# Altium PCB Schematics.PcbDoc
Units mm, origin at the board's own origin, x right, y up, seen from the top; angles counter-clockwise.
Board outline 70 x 70 mm, 2 copper layers (Top Layer, Bottom Layer), stack 1.1 mm thick; 21 components, 14 nets, 82 pads, 2 vias.
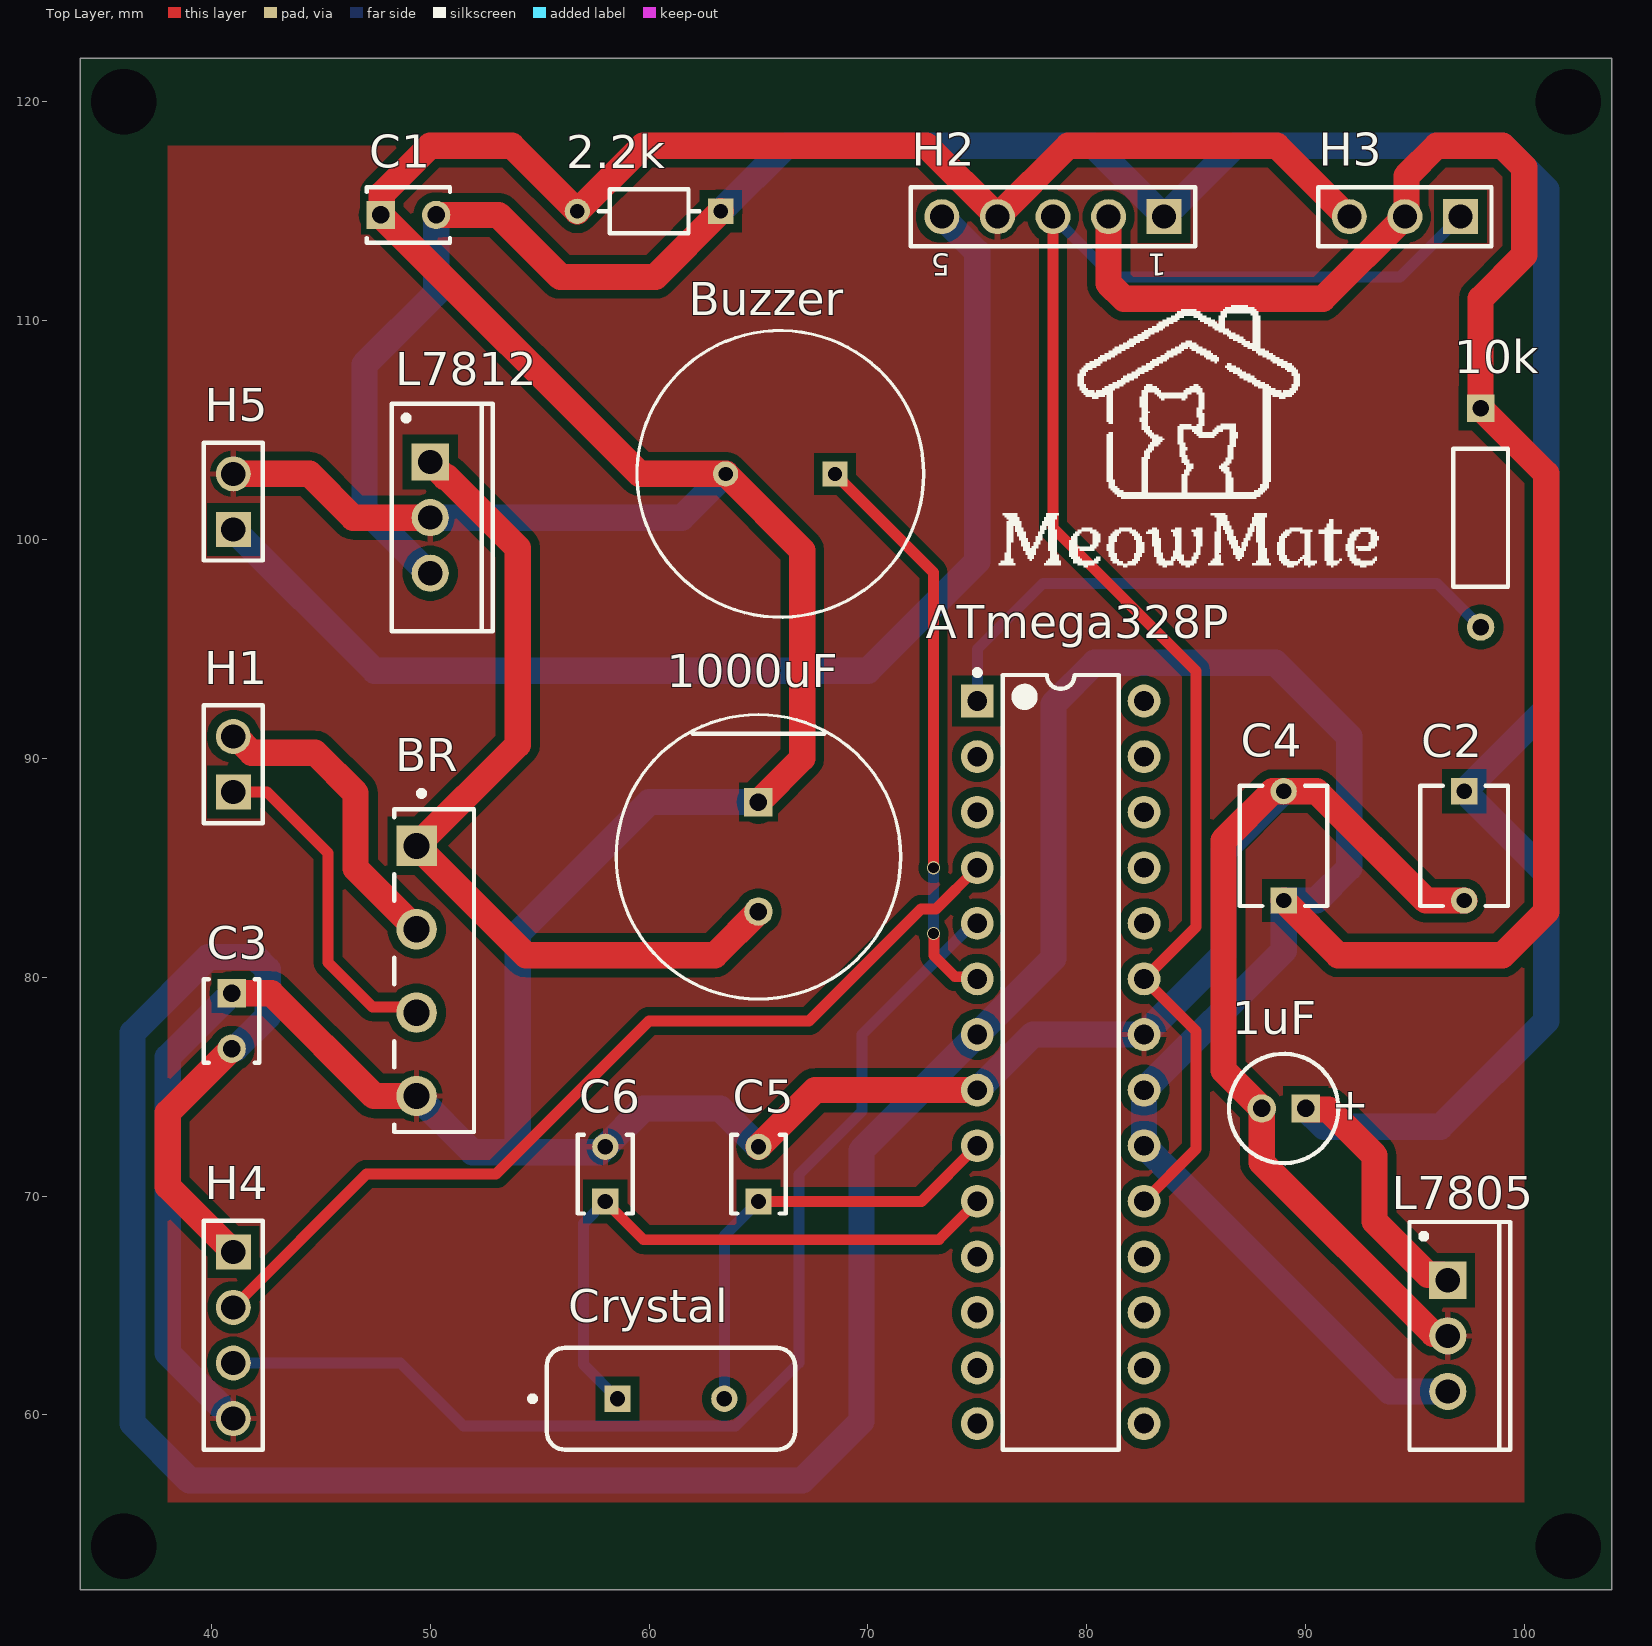
[diagram p0: Top Layer view]
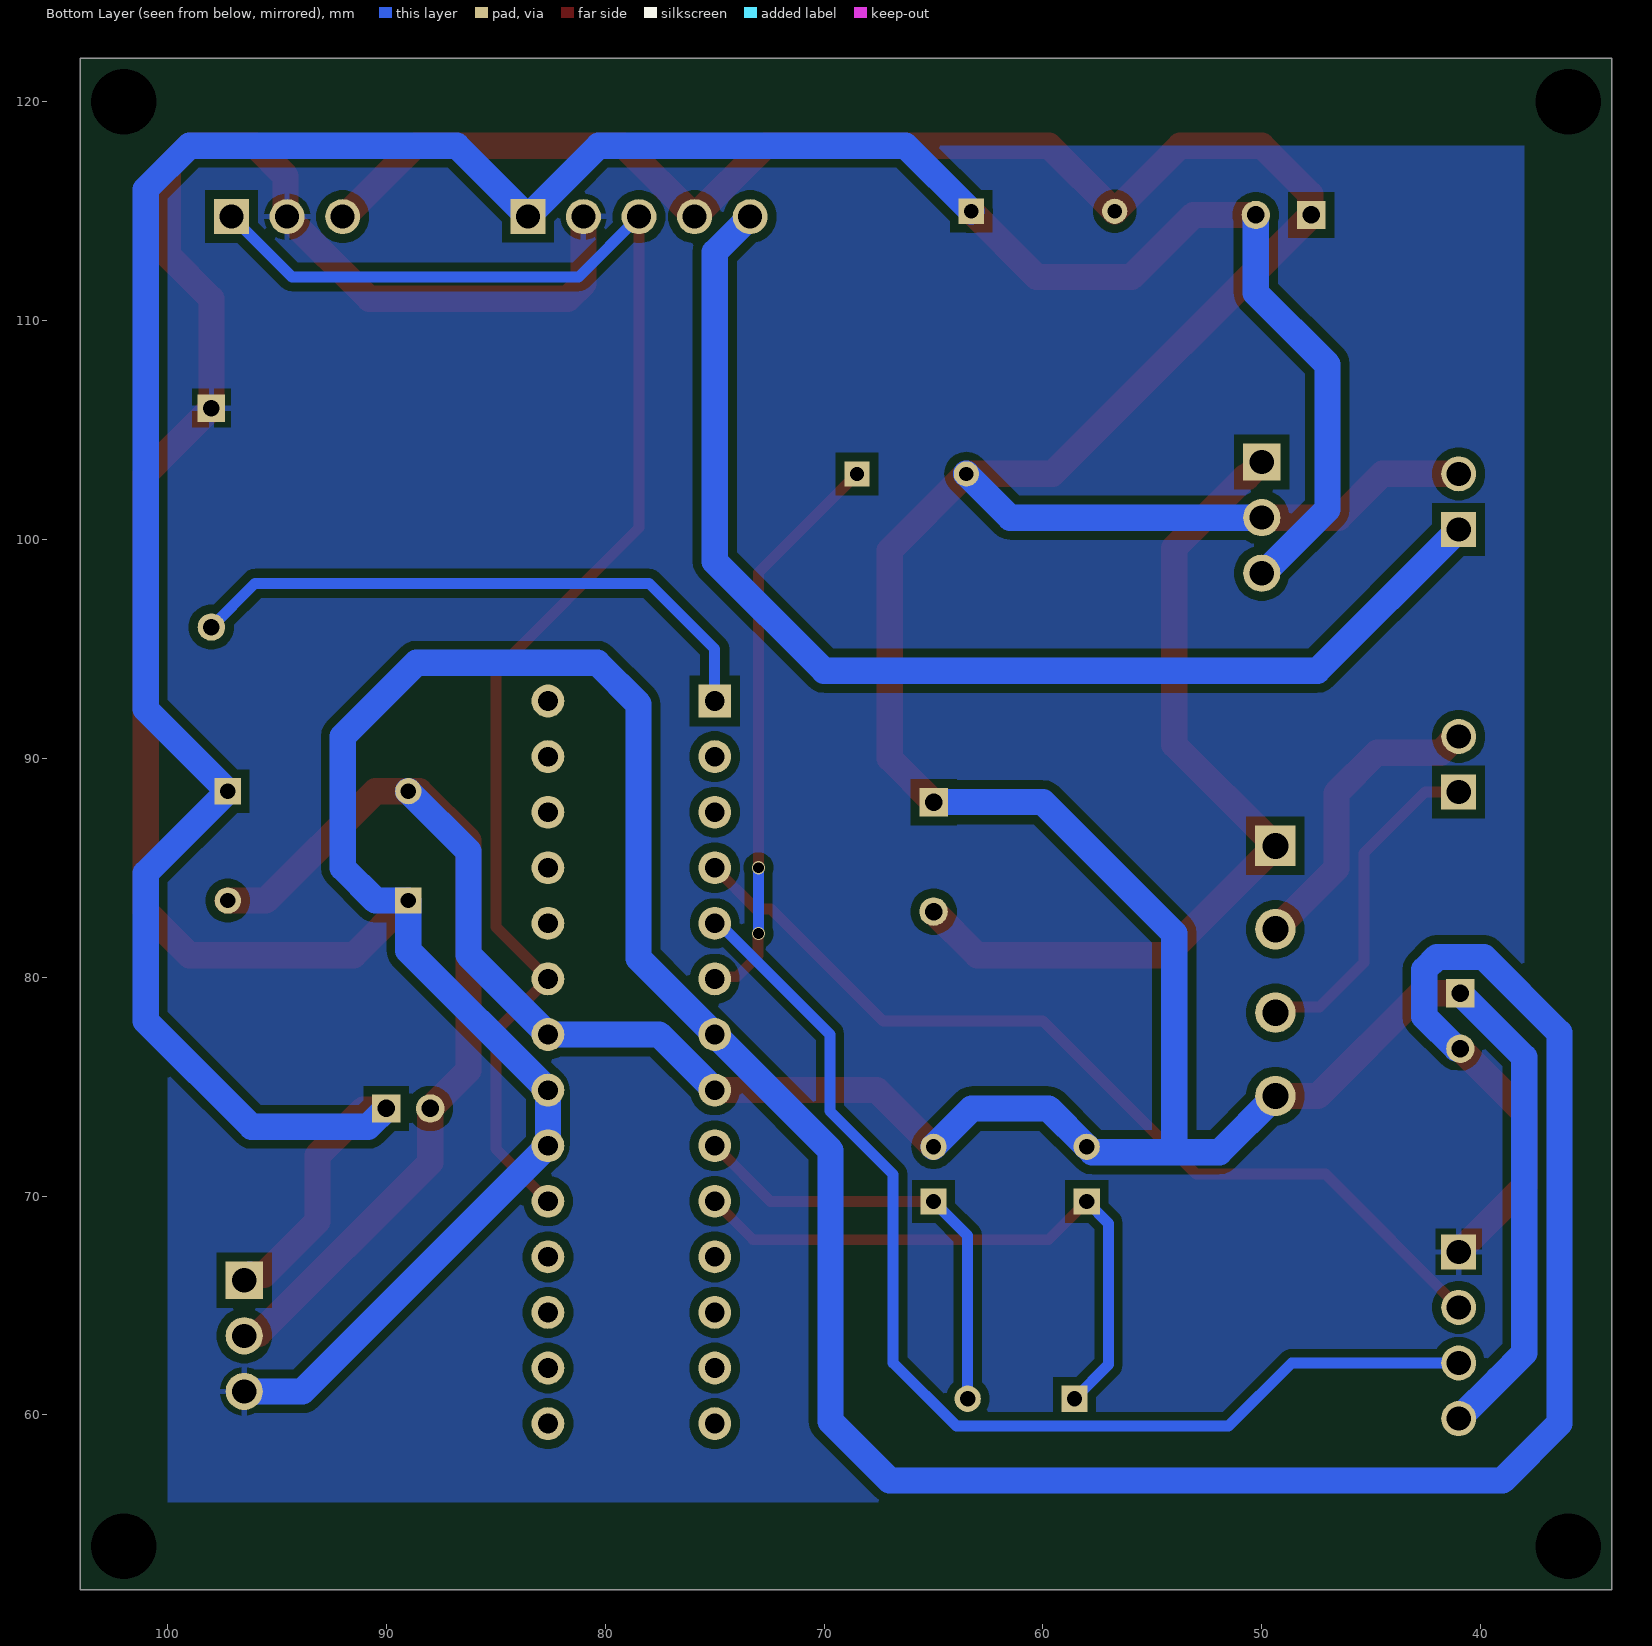
[diagram p1: Bottom Layer view, seen from below]
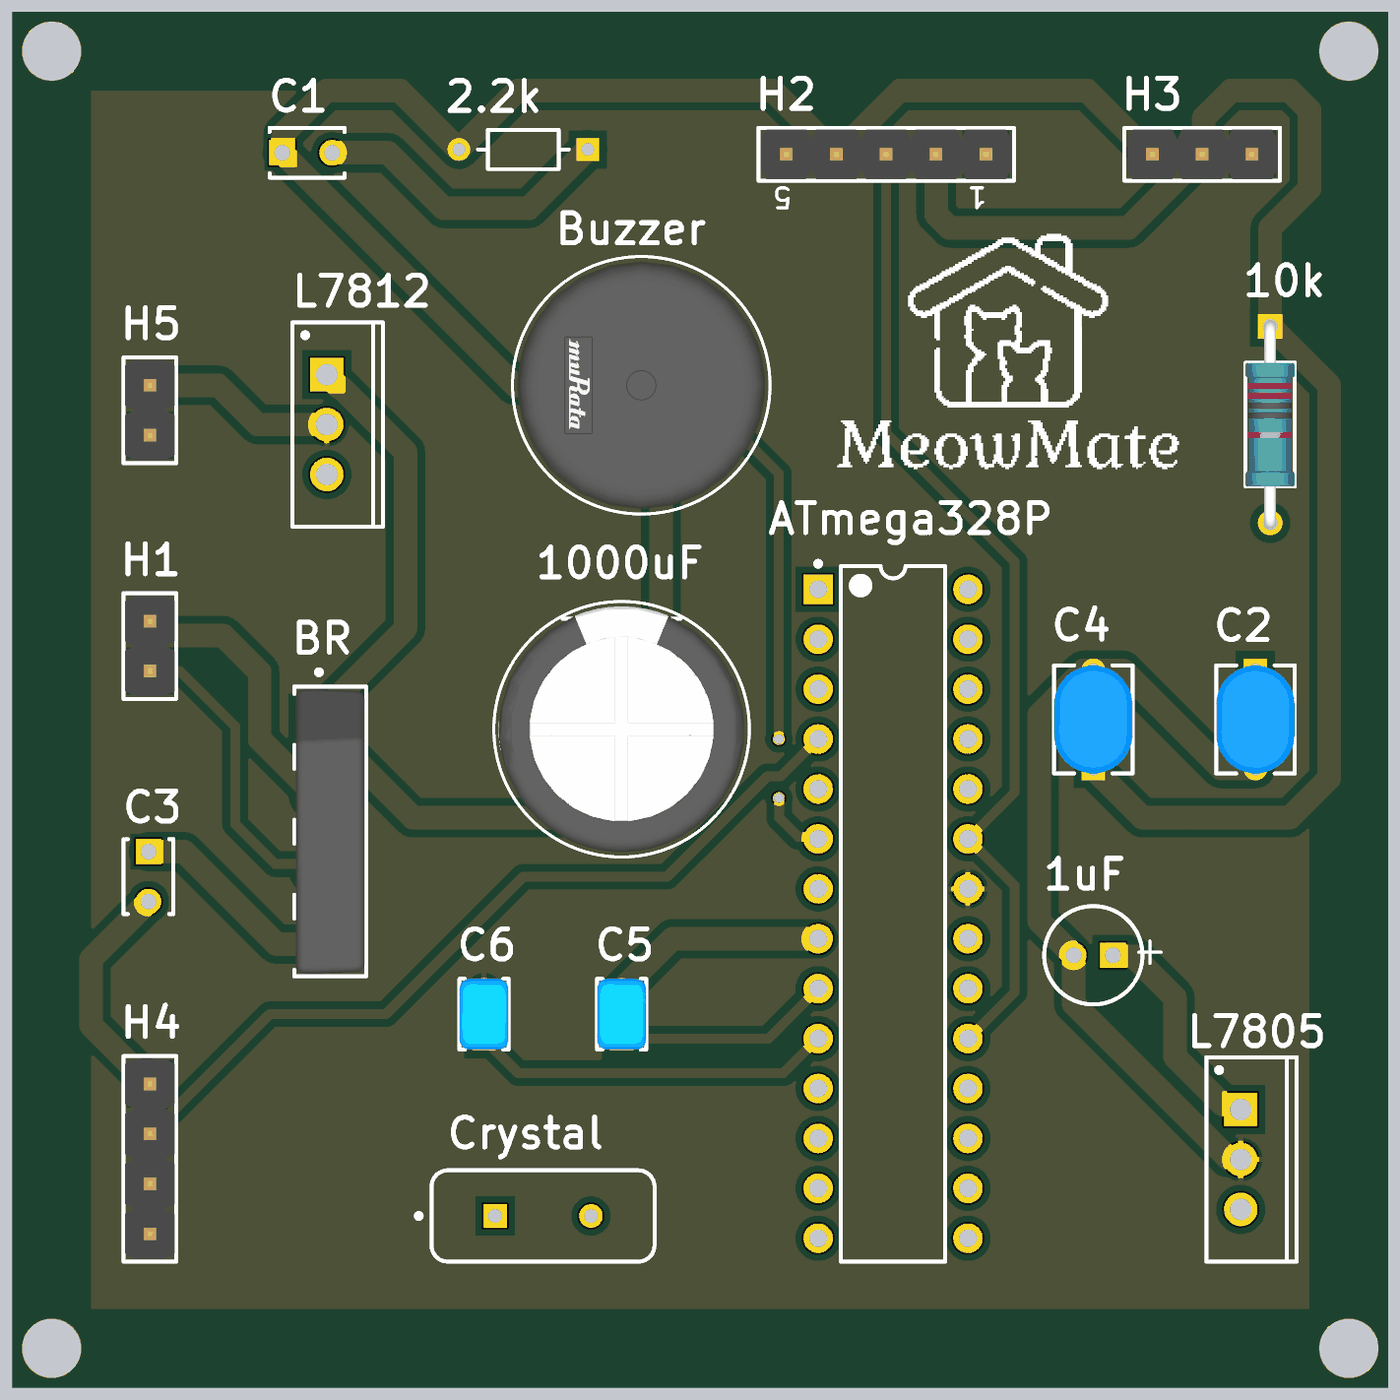
[diagram p2: 3D render of the assembled board from above, using the file's embedded part models]

## Layer stack, top to bottom
Top Solder: solder mask 0.05, Solder Resist, Dk 3.5
Top Layer: signal copper 0.1
Dielectric 1: dielectric 0.9, FR-4, Dk 4.8
Bottom Layer: signal copper 0.1
Bottom Solder: solder mask 0.05, Solder Resist, Dk 3.5

## Board outline
34,52 104,52 104,122 34,122

## Design rules (kind name [scope] priority, off if disabled: settings)
Clearance [All] p1: gap=0.4 ignorepadtopadclearanceinfootprint=FALSE
HoleSize [All] p1: absolutevalues=TRUE maxlimit=5 minlimit=0.025 maxpercent=80.000 minpercent=20.000
PolygonConnect [All] p1: connectstyle=Relief reliefconductorwidth=0.254 reliefentries=4 polygonreliefangle="90 Angle" airgapwidth=0.254
RoutingVias [All] p1: holewidth=0.5 width=0.6 viastyle="Through Hole" minholewidth=0.5 minwidth=0.6 maxholewidth=0.5 maxwidth=0.6
SilkToSilkClearance [All] p1: silktosilkclearance=0.17
SolderMaskExpansion [All] p1: expansion=0.102 istentingtop=FALSE
Width WidthPOW [(InNet('GND') OR InNet('VCC5') OR InNet('VCC12') OR InNet('VCC15AC') OR InNet('VCC15DC') OR InNet('VCCM'))] p1: maxlimit=1.5 minlimit=1.2 preferedwidth=1.2
Width [All] p2: maxlimit=0.75 minlimit=0.5 preferedwidth=0.5
28 further rules are at their usual default settings.

## Components (designator, comment, footprint, x,y, rotation, side; value= is the part's Value field where it differs from the comment)
1uF "ECA-1HHG010" CAPPR55-200-1100X500X1200 89,74 r180 top
2.2k "CF18JT2K20" FP-CF18-MFG 60,115 r180 top value=2.2kΩ
10k "MBB02070C1002FCT00" FP-MBB0207-MFG 98,101 r270 top
1000uF "EEUFM1E102" FP-RAD-TH-D_12_5_0_5-L_20-MFG 65,85.5 r270 top
ATmega328P "ATmega328-PU" 28P3 78.81,76.11 r0 top
BR "KBP206G" FP-KBP-MFG 50.175,80.3 r270 top value=25pF
Buzzer "PKM13EPYH4000-A0" FP-PKM13EPYH4000-A0-MFG 66,103 r180 top
C1 "10nF" KEMT-C315-THT-2 49,114.83 r0 top
C2 "10uF" FP-RCE3M1-MFG 97.25,86 r270 top
C3 "10nF" KEMT-C315-THT-2 40.925,78 r270 top
C4 "10uF" FP-RCE3M1-MFG 89,86 r90 top
C5 "22pF" FP-RCE0DB-MFG 65,71 r90 top
C6 "22pF" FP-RCE0DB-MFG 58,71 r90 top
Crystal "FOXSLF/160-20" FOX-FOXSLF160-20 61,60.735 r0 top
H1 "61300211121" 61300211121 41,89.73 r90 top
H2 "61300511121" 61300511121 78.46,114.755 r180 top
H3 "61300311121" 61300311121 94.54,114.755 r180 top
H4 "61300411121" 61300411121 41,63.64 r270 top
H5 "61300211121" 61300211121 41,101.73 r90 top
L7805 "L7805CV" TO220#1 96.5,63.61 r270 top
L7812 "L7812CV" TO220#2 50,101 r270 top

## Footprints (in the part's own frame and the unit in brackets; to place one, negate y for a bottom-side part, rotate by r counter-clockwise, add the part's x,y. Pads: shape width x height; smd on the part's side, far side on the other; paste and mask are expansions set on the pad)
28P3 [mm] "28-Pin Plastic Dual In-Line Package (PDIP)"
  rect 1.5x1.5 hole 0.9: 1(-3.81,16.51)
  round 1.5 hole 0.9: 2(-3.81,13.97) 3(-3.81,11.43) 4(-3.81,8.89) 5(-3.81,6.35) 6(-3.81,3.81) 7(-3.81,1.27) 8(-3.81,-1.27) 9(-3.81,-3.81) 10(-3.81,-6.35) 11(-3.81,-8.89) 12(-3.81,-11.43) 13(-3.81,-13.97) 14(-3.81,-16.51) 15(3.81,-16.51) 16(3.81,-13.97) 17(3.81,-11.43) 18(3.81,-8.89) 19(3.81,-6.35) 20(3.81,-3.81) 21(3.81,-1.27) 22(3.81,1.27) 23(3.81,3.81) 24(3.81,6.35) 25(3.81,8.89) 26(3.81,11.43) 27(3.81,13.97) 28(3.81,16.51)
  silkscreen extent -3.93,-17.7 2.65,17.93, body extent -3.6,-17.65 3.6,17.65, height 4.58
61300211121 [mm] "Pin Header, pitch 2.54 mm, THT, Vertical, single row, 2p"
  rect 1.6x1.6 hole 1.1: 1(-1.27,0)
  round 1.6 hole 1.1: 2(1.27,0)
  silkscreen extent -2.69,-1.35 2.69,1.35, body extent -2.54,-1.27 2.54,1.27, height 8.57
61300311121 [mm] "Pin Header, pitch 2.54 mm, THT, Vertical, single row, 3p"
  rect 1.6x1.6 hole 1.1: 1(-2.54,0)
  round 1.6 hole 1.1: 2(0,0) 3(2.54,0)
  silkscreen extent -3.96,-1.35 3.96,1.35, body extent -3.81,-1.27 3.81,1.27, height 8.57
61300411121 [mm] "Pin Header, pitch 2.54 mm, THT, Vertical, single row, 4p"
  rect 1.6x1.6 hole 1.1: 1(-3.81,0)
  round 1.6 hole 1.1: 2(-1.27,0) 3(1.27,0) 4(3.81,0)
  silkscreen extent -5.23,-1.35 5.23,1.35, body extent -5.08,-1.27 5.08,1.27, height 8.57
61300511121 [mm] "Pin Header, pitch 2.54 mm, THT, Vertical, single row, 5p"
  rect 1.6x1.6 hole 1.1: 1(-5.08,0)
  round 1.6 hole 1.1: 2(-2.54,0) 3(0,0) 4(2.54,0) 5(5.08,0)
  silkscreen extent -6.5,-1.35 6.5,1.35, body extent -6.35,-1.27 6.35,1.27, height 8.57
CAPPR55-200-1100X500X1200 [mm] "THD, 2-Leads, Dia 5mm, Body Length 11mm"
  rect 1.3x1.3 hole 0.8: 1(-1,0)
  round 1.3 hole 0.8: 2(1,0)
  silkscreen extent -2.5,-2.5 2.5,2.5, body extent -2.5,-2.5 2.5,2.5, height 12
FOX-FOXSLF160-20 [mm] "THD, 2-Leads, Body 11.35x4.65mm"
  rect 1.2x1.2 hole 0.7: 1(-2.44,0)
  round 1.2 hole 0.7: 2(2.44,0)
  silkscreen extent -6.45,-2.32 5.68,2.32, body extent -5.67,-2.32 5.68,2.33, height 3.6
FP-CF18-MFG [mm]
  rect 1.15x1.15 hole 0.65 paste-1000 mask+0: 1(-3.28,0)
  round 1.15 hole 0.65 paste-1000 mask+0: 2(3.28,0)
  silkscreen extent -2.3,-1 2.3,1
FP-KBP-MFG [mm]
  rect 1.85x1.85 hole 1.2 paste-1000 mask+0: 1(-5.7,-0.8)
  round 1.85 hole 1.2 paste-1000 mask+0: 2(-1.89,-0.8) 3(1.92,-0.8) 4(5.73,-0.8)
  silkscreen extent -8.22,-1.83 7.37,1.83, body extent -7.47,-1.92 7.47,1.92, height 0.25
FP-MBB0207-MFG [mm]
  rect 1.25x1.25 hole 0.75 paste-1000 mask+0: 1(-5,0)
  round 1.25 hole 0.75 paste-1000 mask+0: 2(5,0)
  silkscreen extent -3.15,-1.25 3.15,1.25, body extent -5.72,-1.35 5.72,1.35, height 0.25
FP-PKM13EPYH4000-A0-MFG [mm]
  rect 1.15x1.15 hole 0.65 paste-1000 mask+0: 1(-2.5,0)
  round 1.15 hole 0.65 paste-1000 mask+0: 2(2.5,0)
  silkscreen extent -6.55,-6.55 6.55,6.55, body extent -6.65,-6.65 6.65,6.65, height 0.25
FP-RAD-TH-D_12_5_0_5-L_20-MFG [mm]
  rect 1.3x1.3 hole 0.8 paste-1000 mask+0: 1(-2.5,0)
  round 1.3 hole 0.8 paste-1000 mask+0: 2(2.5,0)
  silkscreen extent -6.5,-6.5 6.5,6.5, body extent -6.6,-6.6 6.6,6.6, height 0.25
FP-RCE0DB-MFG [mm]
  rect 1.2x1.2 hole 0.7 paste-1000 mask+0: 1(-1.25,0)
  round 1.2 hole 0.7 paste-1000 mask+0: 2(1.25,0)
  silkscreen extent -1.8,-1.25 1.8,1.25, body extent -1.95,-1.35 1.95,1.35, height 0.25
FP-RCE3M1-MFG [mm]
  rect 1.2x1.2 hole 0.7 paste-1000 mask+0: 1(-2.5,0)
  round 1.2 hole 0.7 paste-1000 mask+0: 2(2.5,0)
  silkscreen extent -2.75,-2 2.75,2, body extent -3.2,-2.1 3.2,2.1, height 0.25
KEMT-C315-THT-2 [mm] "THD, 2-Leads, Body 3.81x2.54mm"
  rect 1.3x1.3 hole 0.8: 1(-1.27,0)
  round 1.3 hole 0.8: 2(1.27,0)
  silkscreen extent -1.91,-1.27 1.91,1.27, body extent -1.91,-1.27 1.91,1.27, height 4.66
TO220#1 [mm] "TO, Thru-Hole, Vertical, Heatsink Mounted; 3 In-Line Leads; Pitch 2.54 mm"
  rect 1.7x1.7 hole 1.1: 1(-2.54,0)
  round 1.7 hole 1.1: 2(0,0) 3(2.54,0)
  silkscreen extent -5.2,-1.75 5.2,2.85, body extent -5.25,-1.8 5.25,2.9, height 19.7
TO220#2 [mm] "TO, Thru-Hole, Vertical, Heatsink Mounted; 3 In-Line Leads; Pitch 2.54 mm"
  round 1.7 hole 1.1: 2(0,0) 3(2.54,0)
  rect 1.7x1.7 hole 1.1: ""(-2.54,0)
  silkscreen extent -5.2,-1.75 5.2,2.85, body extent -5.25,-1.8 5.25,2.9, height 19.7

## Part data
1uF: library part CMP-1665-00039-1, "Aluminum Electrolytic Capacitor, 1 uF, +/- 20%, 50 V, -55 to 105 degC, 2-Pin THD, RoHS, Bulk", Max Operating Temperature="70 degC", Min Operating Temperature="-30 degC", Package Quantity=150, Channels=2, ComponentLink1Description="Manufacturer URL", ComponentLink1URL=http://www.panasonic.com/, ComponentLink2Description=Datasheet, ComponentLink2URL=https://datasheet.ciiva.com/7275/94060-7275472.pdf, DatasheetVersion=Mar-05, Mount="Through Hole", PackageDescription="2-Pin Radial Lead, Dia 5 mm, Body Length 11 mm", PackageReference=CAPPR55-200-1100X500X1200, Packaging=Bulk, Radiation Hardening=No, RoHSCompliant=true
2.2k: library part CMP-26528-000001-1, "RES 2.2K OHM 1/8W 5% CF AXIAL", Manufacturer="Stackpole Electronics Inc", Package=CF18, Power Rating=0.125W, Resistance=2.2kΩ, Temperature="-55°C to +155°C", Temperature Coefficient=0/-400ppm/°C, Temperature Range High=+155°C, Temperature Range Low=-55°C, Tolerance=5%, Voltage Rating=250V, Automotive=No, Category=Res, ComponentLink2Description=Datasheet, ComponentLink2URL=https://www.seielect.com/catalog/sei-cf_cfm.pdf, Composition="Carbon Film", Device Class L1="Passive Components", Device Class L2=Resistors, Device Class L3="Through-Hole Resistors", Digikey Description="RES 2.2K OHM 1/8W 5% CF AXIAL", Height=2mm, Ipc Land Pattern Name=RESAD656W65L360D200, Lead Free=Yes, Manufacturer Part Number=CF18JT2K20, Octopart=https://octopart.com/cf18jt2k20-stackpole+electronics-19205714, RoHS=TRUE, Series=CF
10k: library part CMP-02408-000035-1, "RES 10K OHM 0.6W 1% AXIAL", Case/Package=Conformal, Max Operating Temperature=155°C, Max Power Dissipation=600mW, Min Operating Temperature=-55°C, Resistance=10kR, Resistance Tolerance=1%, Resistor Type="Metal Film", Temperature Coefficient=50ppm/°C, Voltage Rating=300V, Construction=Cylindrical, Contact Plating=Tin, Diameter=2.5mm, Features="Automotive AEC-Q200", Lead Free="Lead Free", Length=6.5mm, Military Standard=Not, Number of Terminations=2, Packaging="Tape and Reel", Power Rating=600mW, Radiation Hardening=No, RoHS Compliant=Yes, Series="MBB 0207 - Professional", Technology="THIN FILM", Termination=Axial, Tolerance=1%, Voltage Rating (DC)=300V
1000uF: library part CMP-05427-000606-1, "Aluminum Electrolytic Capacitors (Radial Lead Type) 1000uF ±20% 25V", Capacitance=1mF, Case/Package=Radial, Dielectric Material=Aluminium, ESR (Equivalent Series Resistance)=18mR, Max Operating Temperature=105°C, Min Operating Temperature=-40°C, Package Quantity=200, Ripple Current=2.6A, Tolerance=20%, Voltage=25V, Construction=RADIAL, Contact Plating=Tin, Diameter=12.5mm, Dissipation Factor=0.14%, Features="General Purpose", Height=20mm, Height - Seated (Max)=0.787inch, Impedance=18mR, Lead Diameter=0.6mm, Lead Free="Lead Free", Lead Length=17mm, Lead Pitch=5mm, Length=20mm, Life (Hours)=5000Hour, Mount="Through Hole", Packaging=Bulk, Radiation Hardening=No, REACH SVHC=Yes, RoHS Compliant=Yes, Series=FM, Termination=Radial, Voltage Rating=25V, Voltage Rating (DC)=25V
ATmega328P: library part CMP-0095-00015-2, "8-bit AVR Microcontroller, 32KB Flash, 1KB EEPROM, 2KB SRAM, 28-pin PDIP, Industrial Grade (-40°C to 85°C)", ComponentLink1Description="Manufacturer URL", ComponentLink1URL=http://www.atmel.com/, ComponentLink2Description="ATmega48A/48PA/88A/88PA/168A/168PA/328/328P Datasheet", ComponentLink2URL=http://www.atmel.com/dyn/resources/prod_documents/8271.pdf, ComponentLink3Description="ATmega48A/48PA/88A/88PA/168A/168PA/328/328P Summary", ComponentLink3URL=http://www.atmel.com/dyn/resources/prod_documents/8271S.pdf, DatasheetVersion="revD, May-2011", PackageDescription="28-lead (0.300\"/7.62mm Wide) Plastic Dual Inline Package (PDIP)", PackageReference=28P3, PackageVersion="revB, Sep-2001", RevisionNote="DatasheetVersion updated. URLs added."
BR: library part CMP-12791-000035-1, "BRIDGE RECT 1PHASE 600V 2A KBP", Capacitance=25pF, Forward Current=2A, Manufacturer="Diodes Inc.", Max Junction Temp=+150°C, Max Repetitive Reverse Voltage=600V, Max Surge Forward Current=65A, Package=KBP, Peak Reverse Current=5uA, Temperature="-65°C to +150°C", Temperature Range Low=-65°C, Automotive=No, Category=Diode, ComponentLink2Description=Datasheet, ComponentLink2URL=https://www.diodes.com/assets/Datasheets/ds21205.pdf, Device Class L1="Discrete Semiconductors", Device Class L2=Diodes, Device Class L3="Rectifier Diodes", Digikey Description="BRIDGE RECT 1PHASE 600V 2A KBP", Footprint Url=https://www.diodes.com/assets/Package-Files/KBP.pdf, Height=12.8mm, Lead Free=Yes, Manufacturer Part Number=KBP206G, Mouser Description="Bridge Rectifiers 2.0A 600V", Octopart=https://octopart.com/kbp206g-diodes+inc.-330175, Reverse Voltage=600V, RoHS=TRUE, Standoff Height=1.8mm, Temperature Range High=+150°C
Buzzer: library part CMP-06202-000019-1, "AUDIO PIEZO TRANSDUCER 30V TH", Capacitance=5.5nF, Frequency=4kHz, Max Operating Temperature=85°C, Max Supply Voltage=25V, Min Operating Temperature=-40°C, Nominal Input Voltage=3V, Package Quantity=500, Voltage Rating (DC)=30V, Diameter=12.6mm, Height=6.9mm, Lead Free="Lead Free", Max Frequency=4kHz, Mount="Through Hole", Packaging=Bulk, Radiation Hardening=No, REACH SVHC="No SVHC", Self Resonant Frequency=4kHz, Termination=Solder, Voltage Rating=3V, Washable=No
C1 C3: library part CMP-1664-00007-1, "Capacitor, Ceramic, 0.01 uF, +/- 10%, 100 V, X7R, -55 to 125 degC, 2-Pin THD, RoHS, Bulk", Case\Package=PDIP, Forward Current="60 mA", Forward Voltage="1.5 V", Max Operating Temperature="100 degC", Max Power Dissipation="400 mW", Min Operating Temperature="-55 degC", Output Voltage="70 V", Package Quantity=2000, Channels=2, ComponentLink1Description="Manufacturer URL", ComponentLink1URL=http://www.kemet.com/, ComponentLink2Description=Datasheet, ComponentLink2URL=http://capacitoredge.kemet.com/capedge2/DataSheet/Datasheet-C315C103K1R5TA.pdf?pn=C315C103K1R5TA{BULK}, DatasheetVersion=Aug-16, Mount="Through Hole", Nominal Vf="1.3 V", PackageDescription="2-Pin Through Hole Device, Body 3.81 x 2.54 mm", PackageReference=C315-THT-2, Packaging=Rail/Tube, Pins=16, Radiation Hardening=No, REACH SVHC=Unknown, RoHSCompliant=true, Vce Max="500 mV"
C2 C4: library part CMP-06035-005744-1, "Cap Ceramic 10uF 25V X7R ±10% Radial 5mm +125°C Automotive Ammo Pack", Case/Package=Radial, Dielectric=X7R, Max Operating Temperature=125°C, Min Operating Temperature=-55°C, Package Quantity=1500, Ratings=AEC-Q200, Resistor Type=Ceramic, Tolerance=10%, Voltage Rating=25V, Capacitance=10uF, Height=5mm, Height - Seated (Max)=0.197inch, Lead Diameter=0.5mm, Lead Pitch=0.197inch, Lead/Base Style="Formed Leads", Length=0.217inch, Mount="Through Hole", Packaging="Tape and Reel", Termination=Radial, Voltage Rating (DC)=25V, Width=0.157inch
C5 C6: library part CMP-06035-026305-1, "Cap Ceramic 22pF 100V C0G ±5% Radial 2.5mm +125°C Bulk", Case/Package=Radial, Dielectric=C0G, Max Operating Temperature=125°C, Min Operating Temperature=-55°C, Package Quantity=500, Ratings=AEC-Q200, Resistor Type=Ceramic, Tolerance=5%, Voltage=100V, Capacitance=22pF, Depth=3.5mm, Diameter=3.6mm, Height=3.5mm, Height - Seated (Max)=0.138inch, Lead Diameter=0.5mm, Lead Free="Lead Free", Lead Pitch=0.098inch, Lead/Base Style=Straight, Length=3.6mm, Mount="Through Hole", Packaging=Bulk, Termination=Radial, Voltage Rating=100V, Voltage Rating (DC)=100V, Width=2.5mm
Crystal: library part CMP-1749-00003-1, "Resistance Weld Thru-Hole Crystal, 16 MHz, -20 to 70 degC, 2-Pin THD, RoHS, Bulk", Case\Package=Axial, Max Operating Temperature="155 degC", Min Operating Temperature="-55 degC", Package Quantity=200, Power Rating="250 mW", Resistance="221 kohm", Tolerance=1%, Voltage Rating="250 V", ComponentLink1Description="Manufacturer URL", ComponentLink1URL=http://www.foxonline.com/, ComponentLink2Description=Datasheet, ComponentLink2URL=http://www.foxonline.com/pdfs/hc49slf.pdf, DatasheetVersion=Mar-15, Length="0.248 inch", Mount="Through Hole", PackageDescription="2-Pin Through Hole Device, Body 11.35 x 4.65 mm", PackageReference=FOXSLF160-20, Packaging=Bulk, RoHSCompliant=true
H1 H5: library part CMP-1712-00002-4, "THT Vertical Pin Header WR-PHD, Pitch 2.54 mm, Single Row, 2 pins", Contact Resistance=20mOhm, Manufacturer="Wurth Elektronik", Operating Temperature=-40to105degC, Rated Current=3A, Withstanding Voltage=500VAC, Working Voltage=250VAC, Datasheet URL=https://katalog.we-online.de/em/datasheet/6130xx11121.pdf, Gender=Male, Manufacturer URL=http://www.we-online.de, Mounting Technology=THT, Orientation=Vertical, Package Reference=61300211121, Packaging=Bag, Part Number=61300211121, Pin Number=2, Pitch=2.54mm, Publisher=WurthElektronik, Row Number=Single
H2: library part CMP-1502-01068-1, "THT Vertical Pin Header WR-PHD, Pitch 2.54 mm, Single Row, 5 pins", Contact Resistance=20mOhm, Manufacturer="Wurth Elektronik", Operating Temperature=-40to105degC, Rated Current=3A, Withstanding Voltage=500VAC, Working Voltage=250VAC, Datasheet URL=https://katalog.we-online.de/em/datasheet/6130xx11121.pdf, Gender=Male, Manufacturer URL=http://www.we-online.de, Mounting Technology=THT, Orientation=Vertical, Package Reference=61300511121, Packaging=Bag, Part Number=61300511121, Pin Number=5, Pitch=2.54mm, Publisher=WurthElektronik, Row Number=Single
H3: library part CMP-1502-01062-1, "THT Vertical Pin Header WR-PHD, Pitch 2.54 mm, Single Row, 3 pins", Contact Resistance=20mOhm, Manufacturer="Wurth Elektronik", Operating Temperature=-40to105degC, Rated Current=3A, Withstanding Voltage=500VAC, Working Voltage=250VAC, Datasheet URL=https://katalog.we-online.de/em/datasheet/6130xx11121.pdf, Gender=Male, Manufacturer URL=http://www.we-online.de, Mounting Technology=THT, Orientation=Vertical, Package Reference=61300311121, Packaging=Bag, Part Number=61300311121, Pin Number=3, Pitch=2.54mm, Publisher=WurthElektronik, Row Number=Single
H4: library part CMP-1502-01064-1, "THT Vertical Pin Header WR-PHD, Pitch 2.54 mm, Single Row, 4 pins", Contact Resistance=20mOhm, Manufacturer="Wurth Elektronik", Operating Temperature=-40to105degC, Rated Current=3A, Withstanding Voltage=500VAC, Working Voltage=250VAC, Datasheet URL=https://katalog.we-online.de/em/datasheet/6130xx11121.pdf, Gender=Male, Manufacturer URL=http://www.we-online.de, Mounting Technology=THT, Orientation=Vertical, Package Reference=61300411121, Packaging=Bag, Part Number=61300411121, Pin Number=4, Pitch=2.54mm, Publisher=WurthElektronik, Row Number=Single
L7805: library part CMP-0244-00483-1, "Positive Voltage Regulator, 5V, 3-Pin TO-220", ComponentLink1Description="Manufacturer URL", ComponentLink1URL=http://www.st.com, ComponentLink2Description=Datasheet, ComponentLink2URL=http://www.st.com/internet/com/TECHNICAL_RESOURCES/TECHNICAL_LITERATURE/DATASHEET/CD00000444.pdf, ComponentLink3Description="Package Specification", ComponentLink3URL=http://www.st.com/internet/com/TECHNICAL_RESOURCES/TECHNICAL_LITERATURE/PACKAGE_INFORMATION/CD00004649.pdf, DatasheetVersion=16/11/2011, PackageDescription="TO, Thru-Hole, Vertical, Heatsink Mounted; 3 In-Line Leads; Pitch 2.54 mm", PackageReference=TO220, PackageVersion=ver3.0
L7812: library part CMP-0244-00450-1, "Positive Voltage Regulator, 12V, 3-Pin TO-220", ComponentLink1Description="Manufacturer URL", ComponentLink1URL=http://www.st.com, ComponentLink2Description=Datasheet, ComponentLink2URL=http://www.st.com/internet/com/TECHNICAL_RESOURCES/TECHNICAL_LITERATURE/DATASHEET/CD00000444.pdf, ComponentLink3Description="Package Specification", ComponentLink3URL=http://www.st.com/internet/com/TECHNICAL_RESOURCES/TECHNICAL_LITERATURE/PACKAGE_INFORMATION/CD00004649.pdf, DatasheetVersion=16/11/2011, PackageDescription="TO, Thru-Hole, Vertical, Heatsink Mounted; 3 In-Line Leads; Pitch 2.54 mm", PackageReference=TO220, PackageVersion=ver3.0

## Free pads (board coordinates)
  round 1.524 hole 3: 2(36,120) 3(102,120) 4(102,54) 5(36,54)

## Via types
v1: diameter 0.6, hole 0.5, Top Layer to Bottom Layer, 2 vias

## Nets (pads, with @x,y where several pads share a name; then routed paths per layer and width w, separated by ;. In a path a pad name is that pad's centre, name@x,y a point inside that pad or via, vN(x,y) a via of type N, cw(c..) or ccw(c..) an arc to the next point about the centre after c; other vN are vias at no path point)
GND: 1uF.2 2.2k.2 1000uF.1 ATmega328P.8 ATmega328P.22 BR.4 Buzzer.2 C1.1 C2.2 C3.1 C4.2 C5.2 C6.2 H2.4 H3.3 H4.4 H5.2 L7805.2 L7812.2 | length 263.7
  Top Layer w1.2: C3.1 42.73,79.27 47.43,74.57 BR.4 ; H5.2 44.486,103 46.486,101 L7812.2 L7812.2@50.096,101.096 ; C5.2 67.59,74.84 ATmega328P.8 ; 1000uF.1 67,90 67,99.5 Buzzer.2 59.56,103 C1.1 47.78,114.88 47.78,115.78 50,118 53.72,118 2.2k.2 59.72,118 72.681,118 H2.4@75.92,114.761 ; H2.4 H2.4@75.92,114.761 ; H3.3 91.934,114.755 88.689,118 79.159,118 H2.4@75.92,114.761 ; L7805.2 96.404,63.706 95.83,63.706 88,71.536 1uF.2 86.25,75.75 86.25,86.25 88.5,88.5 90.5,88.5 95.5,83.5 C2.2
  Bottom Layer w1.2: C3.1 38,76.345 38,62.83 39.2,61.63 39.2,61.624 40.994,59.83 H4.4 ; BR.4 51.945,72 54,72 ; L7812.2 61.5,101 Buzzer.2 ; C5.2 63.25,74 59.75,74 C6.2 57.75,72 54,72 ; 1000uF.1 60,88 54,82 54,72 ; ATmega328P.8 77.54,77.38 ATmega328P.22 86.25,81.01 86.25,85.75 C4.2 ; H2.4 H2.4@75.92,114.761 ; H3.3@91.923,114.755 H3.3
Net10k_2: 10k.2 ATmega328P.1 | length 27.5
  Bottom Layer w0.5: ATmega328P.1 75,95 78,98 96,98 10k.2
NetATmega328P_4: ATmega328P.4 H4.2 | length 42.3
  Top Layer w0.5: H4.2 47.09,71 53,71 60,78 67.313,78 72.421,83.108 73.108,83.108 ATmega328P.4
NetATmega328P_5: ATmega328P.5 H4.3 | length 51.8
  Bottom Layer w0.5: H4.3 48.63,62.37 51.515,59.485 63.958,59.485 66.843,62.37 66.843,70.99 69.727,73.875 69.727,77.384 74.803,82.46 ATmega328P.5
NetATmega328P_6: ATmega328P.6 Buzzer.1 | length 26.3
  Top Layer w0.5: Buzzer.1 73,98.5 v1(73,85) ; v1(73,82) 73.019,81.981 73.019,80.981 73.979,80.021 74.899,80.021 ATmega328P.6
  Bottom Layer w0.5: v1(73,82) v1(73,85)
NetATmega328P_9: ATmega328P.9 C5.1 Crystal.2 | length 21.1
  Top Layer w0.5: C5.1 72.45,69.75 ATmega328P.9
  Bottom Layer w0.5: Crystal.2 63.44,68.19 C5.1 C5.1@65.25,70
NetATmega328P_10: ATmega328P.10 C6.1 Crystal.1 | length 28.5
  Top Layer w0.5: C6.1 59.75,68 73.24,68 ATmega328P.10
  Bottom Layer w0.5: C6.1 57,68.75 57,62.295 Crystal.1
NetATmega328P_19: ATmega328P.19 ATmega328P.23 H2.3 H3.1 | length 71.6
  Top Layer w0.5: H2.3 78.46,100.54 85,94 85,82.3 ATmega328P.23 85,77.54 85,72.14 ATmega328P.19
  Bottom Layer w0.5: H2.3 81.215,112 94.325,112 H3.1 ; ATmega328P.23 ATmega328P.23@82.649,79.92
NetBR_3: BR.3 H1.1 | length 15.5
  Top Layer w0.5: H1.1 42.54,88.46 45.333,85.667 45.333,80.667 47.362,78.638 49.117,78.638 BR.3
VCC5: 10k.1 ATmega328P.7 ATmega328P.20 ATmega328P.21 C3.2 C4.1 H2.2 H3.2 H4.1 L7805.3 | length 248.2
  Top Layer w1.2: C3.2@40.898,76.73 C3.2 38,73.805 38,70.45 H4.1 ; H2.2 81,111.703 81.703,111 90.791,111 94.54,114.749 H3.2 94.617,114.832 94.617,116.617 96,118 99,118 100,117 100,113 98,111 10k.1 101,103 101,83 99,81 91.5,81 C4.1 ; L7805.3@96.419,61.151 L7805.3
  Bottom Layer w1.2: C3.2 40.944,76.749 41.118,76.749 42.575,78.206 42.575,80.334 41.989,80.92 39.861,80.92 36.4,77.459 36.4,59.6 39,57 67,57 69.705,59.705 69.705,72.085 ATmega328P.7 78.48,80.86 78.48,92.48 80.37,94.37 88.63,94.37 92,91 92,85 90.5,83.5 C4.1 89,81.22 ATmega328P.21 ATmega328P.20 93.85,61.07 L7805.3
VCC12: 1uF.1 2.2k.1 C1.2 C2.1 H2.1 L7805.1 L7812.3 | length 143.5
  Top Layer w1.2: C1.2 53.125,114.83 55.955,112 60.28,112 2.2k.1 ; H2.1@83.34,114.961 83.34,114.955 H2.1 ; 1uF.1 90.05,73.95 91.05,73.95 93.15,71.85 93.15,68.85 95.6,66.4 96.25,66.4 L7805.1
  Bottom Layer w1.2: L7812.3 49.924,98.46 47,101.384 47,108 50.27,111.27 C1.2 ; 2.2k.1 66.28,118 80.301,118 83.34,114.961 83.34,114.955 H2.1 86.785,118 99,118 101,116 101,92.25 C2.1 101,84.75 101,78 96.161,73.161 90.839,73.161 1uF.1 ; L7805.1@96.25,66.4 L7805.1
VCC15AC: BR.2 H1.2 | length 14
  Top Layer w1.2: H1.2 41.108,91 41.848,90.26 44.74,90.26 46.583,88.417 46.583,84.982 BR.2
VCC15DC: 1000uF.2 BR.1 L7812. | length 39.7
  Top Layer w1.2: L7812. 50.69,102.85 50.766,102.85 54,99.616 54,90.625 BR.1 54.375,81 63,81 1000uF.2
VCCM: H2.5 H5.1 | length 55.2
  Bottom Layer w1.2: H5.1 47.46,94 70,94 75,99 75,113.129 73.38,114.749 H2.5
pads on no net: ATmega328P.2 ATmega328P.3 ATmega328P.11 ATmega328P.12 ATmega328P.13 ATmega328P.14 ATmega328P.15 ATmega328P.16 ATmega328P.17 ATmega328P.18 ATmega328P.24 ATmega328P.25 ATmega328P.26 ATmega328P.27 ATmega328P.28

## Polygon pours and split planes (outlines as drawn)
GND on Top Layer "GND_L01_P000" (solid, remove dead copper, pour order 0): 38,118 38,56 100,56 100,118
VCC5 on Bottom Layer "VCC5_L02_P001" (solid, remove dead copper, pour order 1): 38,118 38,56 100,56 100,118

## Silkscreen, mask and mechanical layers (free items; w line width, h text height)
Top Overlay:
  drawing of 10 lines, arcs and shapes, not listed

## Text inside footprints (layer, text, board x,y; h text height)
1uF: Top Overlay "+" at 92.908,74.737 h1.5 r180
H2: Top Overlay "1" at 83.66,113.055 h1.02 r180; Top Overlay "5" at 73.76,113.055 h1.02 r180